# Altium PCB menb_HV_v1.0 - Cu.PcbDoc (part 1 of 3)
Units mil, origin at the board's own origin, x right, y up, seen from the top; angles counter-clockwise.
Board outline 6102.36 x 4921.26 mil, 2 copper layers (Top Layer, Bottom Layer); 139 components, 224 nets, 601 pads, 106 vias.
Unrouted connection lines stored in the file: 1.
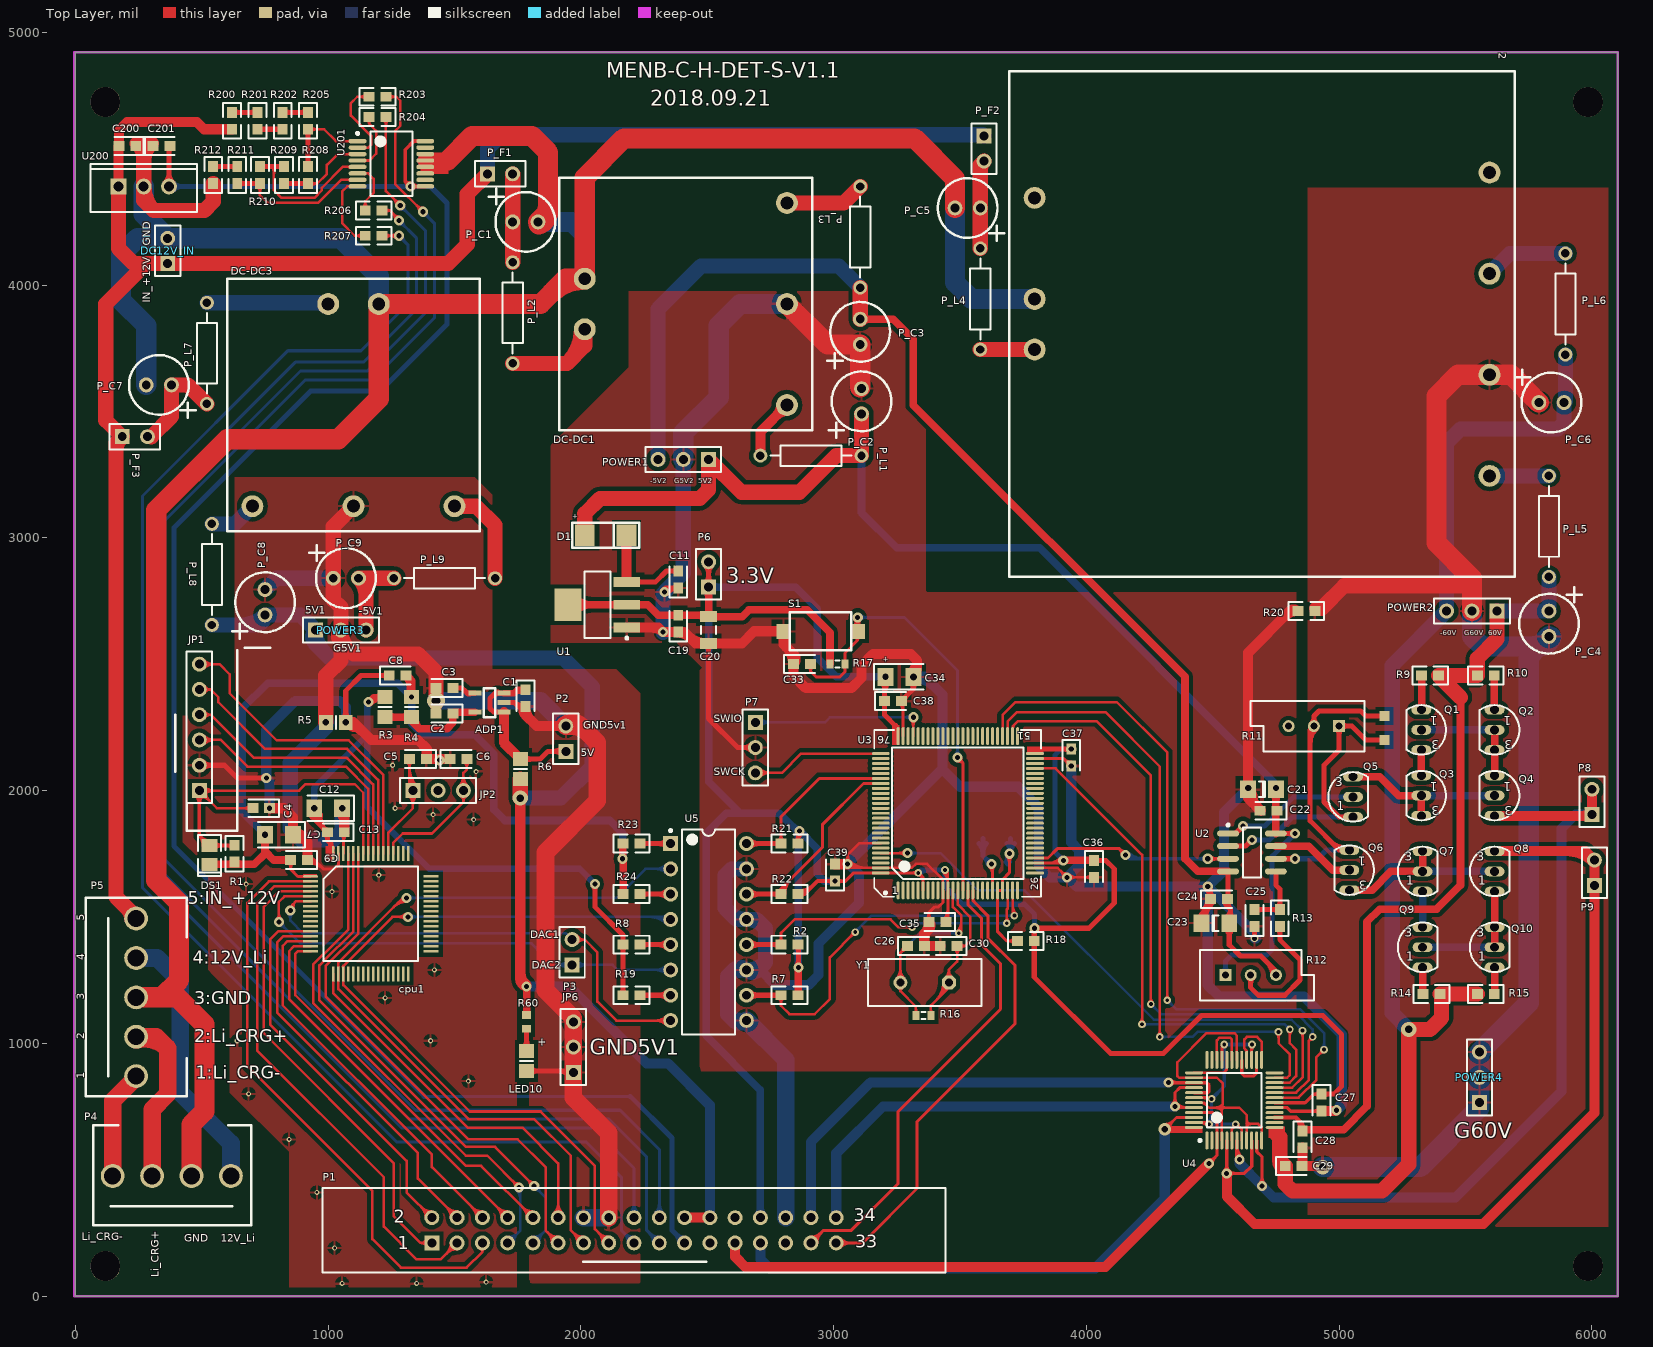
[diagram p0: Top Layer view]
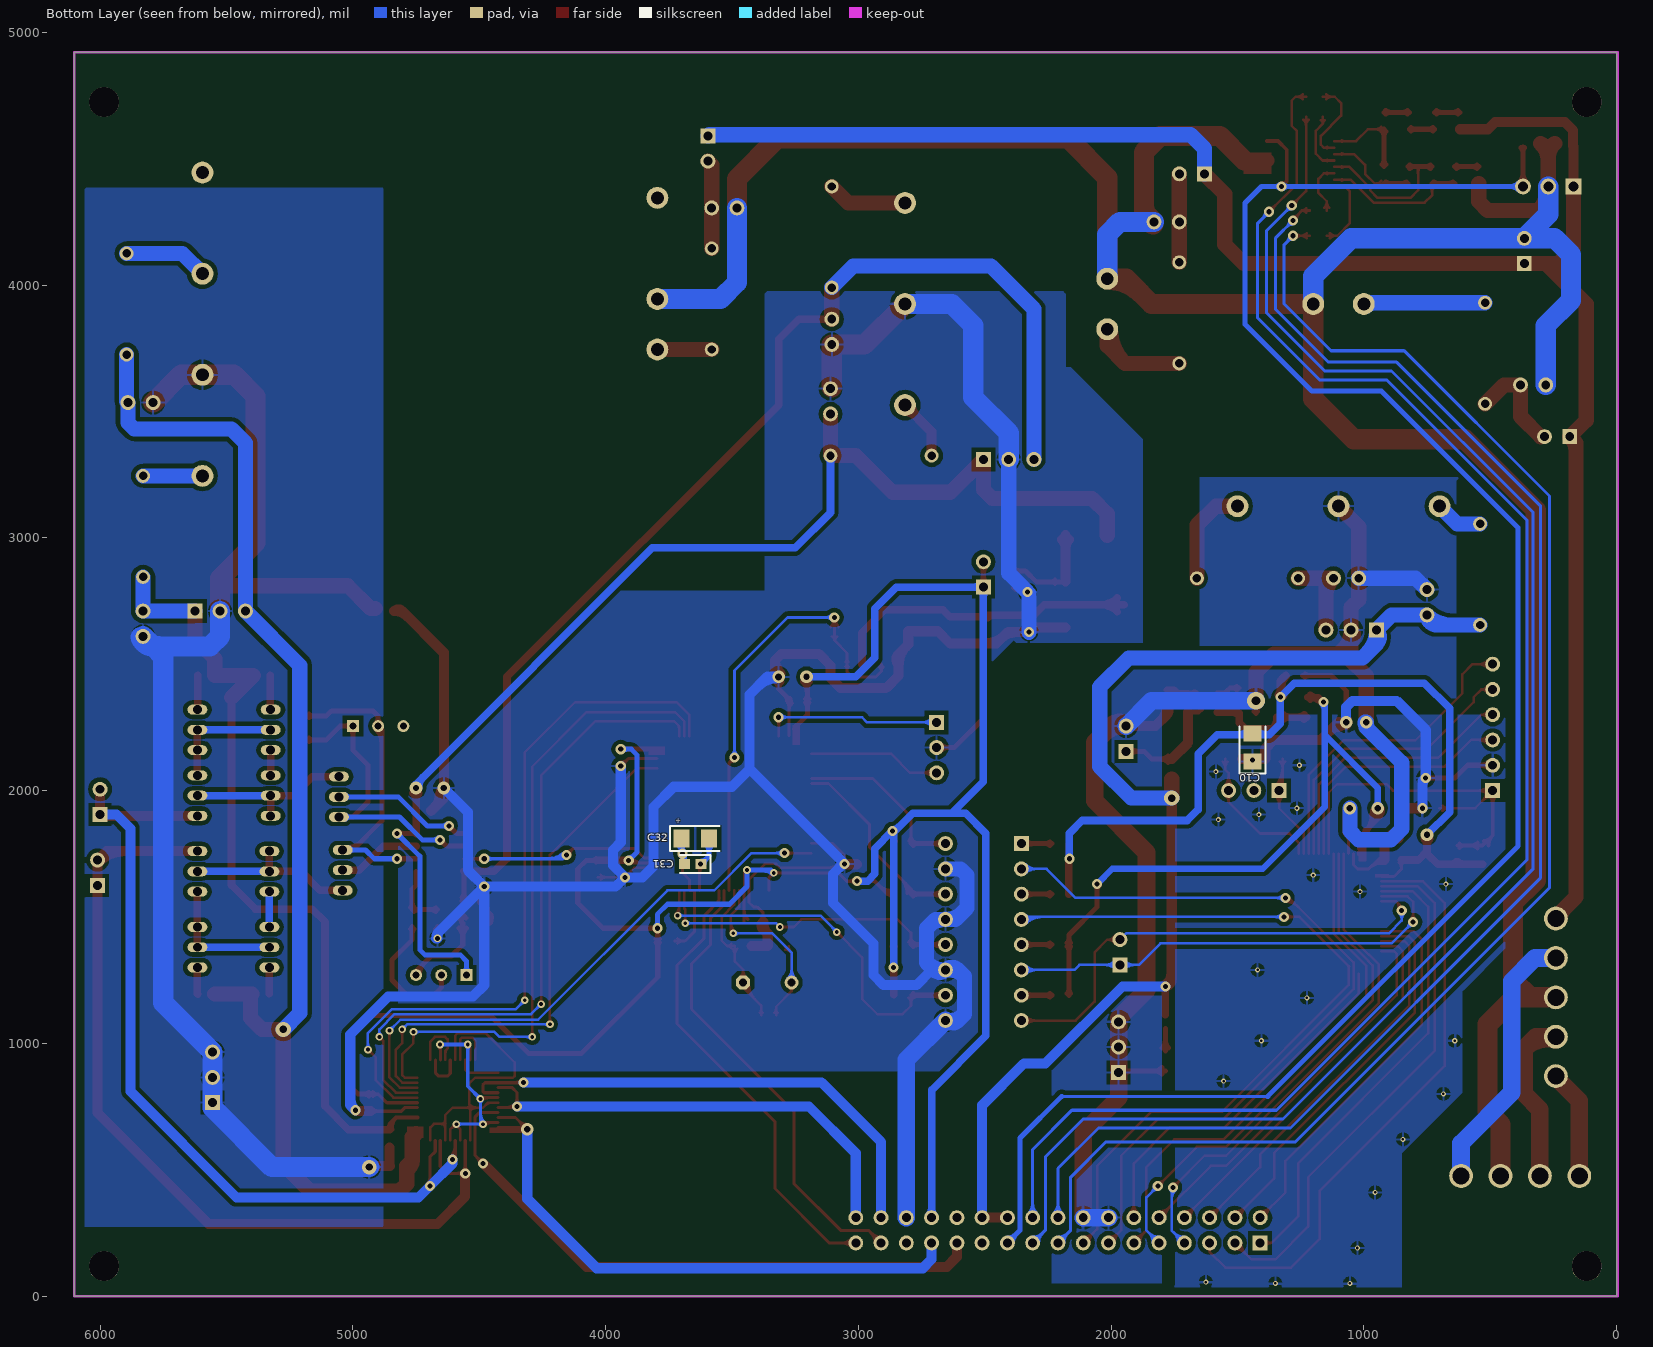
[diagram p1: Bottom Layer view, seen from below]

## Layer stack, top to bottom
Top Layer: signal copper 1.4
Dielectric: dielectric 12.6, FR-4, Dk 4.8
Bottom Layer: signal copper 1.4

## Board outline
0,0 0,4921.26 6102.36,4921.26 6102.36,0

## Design rules (kind name [scope] priority, off if disabled: settings)
Clearance poly [INPolygon] p1: gap=17
Clearance all [All] p2: gap=6
ComponentClearance [All] p1 off: gap=2 collisioncheckmode=3 verticalgap=2 showdistances=FALSE
FabricationTestPointUsage TestPointUsage [All] p1: valid=0 allowmultiple=FALSE
FabricationTestpoint Testpoint [All] p1: side=3 testpointundercomponent=TRUE minsize=40 maxsize=100 preferedsize=60 minholesize=0 maxholesize=40 preferedholesize=32 testpointgrid=1 allowsidetop=TRUE allowsidebottom=TRUE usegrid=TRUE gridtolerance=0.01
HoleSize [All] p1: absolutevalues=TRUE maxlimit=500 minlimit=0 maxpercent=80.000 minpercent=20.000
HoleToHoleClearance [All] p1: gap=1 allowstackedmicrovias=TRUE
MinimumSolderMaskSliver [All] p1: minsoldermaskwidth=0
PolygonConnect [All] p1: connectstyle=Relief reliefconductorwidth=10 reliefentries=4 polygonreliefangle="90 Angle"
RoutingVias [All] p1: holewidth=20 width=30 viastyle="Through Hole" minholewidth=8 minwidth=20 maxholewidth=48 maxwidth=50
SilkToSilkClearance [All] p1: silktosilkclearance=0
SilkscreenOverComponentPads [IsPad] p1: minsilkscreentomaskgap=0
SolderMaskExpansion [All] p1: expansion=4
Width Width_GND [InNetClass('GND')] p1: maxlimit=100 minlimit=10 preferedwidth=80 minimp=50.000000 maximp=50.000000 favimp=50.000000
Width Width_POWER [InNetClass('VCC-VEE')] p2: maxlimit=100 minlimit=10 preferedwidth=40 minimp=50.000000 maximp=50.000000 favimp=50.000000
Width Width_ALL [All] p3: maxlimit=100 minlimit=5 preferedwidth=10 minimp=50.000000 maximp=50.000000 favimp=50.000000
20 further rules are at their usual default settings.

## Classes and differential pairs
component class 输出板: DC12V_IN P4 P5 P11 P12 POWER1 POWER2 POWER3 POWER4 R2 R7 R8 R19 R21 R22 R23 R24 U5
component class U_ADC_USB: ADP1 bead C1 C2 C3 C4 C5 C6 C7 C8 C9 C10 C12 C13 cpu1 DS1 JP1 JP2 JP6 LED10 P1 P2 P3 P10 R1 R3 R4 R5 R6 R60
component class U_电源3: 2 12-34V 33uH DC-DC1 DC-DC3 P_C1 P_C2 P_C3 P_C4 P_C5 P_C6 P_C7 P_C8 P_C9 P_F1 P_F2 P_F3 P_L1 P_L2 P_L3 P_L4 P_L5 P_L6 P_L7 P_L8 P_L9
component class U_Li_Monitor: C200 C201 R200 R201 R202 R203 R204 R205 R206 R207 R208 R209 R210 R211 R212 U200 U201
component class 高压刺激电路: C11 C19 C20 C21 C22 C23 C24 C25 C26 C27 C28 C29 C30 C31 C32 C33 C34 C35 C36 C37 C38 C39 D1 P6 P7 P8 P9 Q1 Q2 Q3 Q4 Q5 Q6 Q7 Q8 Q9 Q10 R9 R10 R11 R12 R13 R14 R15 R16 R17 R18 R20 S1 U1 U2 U3 U4 Y1

## Components (designator, comment, footprint, x,y, rotation, side; value= is the part's Value field where it differs from the comment)
2 "12-60" 12-60 3795,3945 r0 top locked
ADP1 "LDO?" ADP1711_3v3 -28325,32510.2 r90 top
C1 "1u" CC1608-0603 1780,2365.2 r270 top
C2 "1u" CC1608-0603 1460,2305.2 r180 top
C3 "10n" CC1608-0603 1460,2405.2 r180 top
C4 "0.1uF" CC1608-0603 735,1930 r180 top
C5 "15p" CC1608-0603 1355,2125 r180 top
C6 "15p" CC1608-0603 1515,2125 r0 top
C7 "10uF" CC3216-1206 805,1825 r180 top
C8 "Cap Semi" CC1608-0603 1275,2455 r0 top
C9 "0.1uF" CC1608-0603 885,1725 r180 top
C10 "10uF" CC3216-1206 1440,2170 r90 bottom
C11 "104" C0603 2385,2835 r90 top
C12 "10uF" CC3216-1206 1000,1930 r180 top
C13 "0.1uF" CC1608-0603 1030,1835 r180 top
C19 "104" C0603 2385,2660 r90 top
C20 "10uF/16V" C1206 2505,2635 r270 top
C21 "Cap" 1206 4695,2005 r180 top
C22 "0.1uF" CC1608-0603 4720,1920 r180 top
C23 "Cap" 1206 4510,1475 r0 top
C24 "0.1uF" CC1608-0603 4525,1570 r0 top
C25 "0.1uF" CC1608-0603 4665,1495 r90 top
C26 "20pF" C0603 3325,1385 r0 top
C27 "0.1uF" C0603 4930,765 r270 top
C28 "0.1uF" C0603 4855,620 r270 top
C29 "0.1uF" C0603 4820,515 r0 top
C30 "20pF" C0603 3455,1385 r180 top
C31 "104" C0603 3655,1710 r0 bottom
C32 "10uF/50V" C0805 3645.04,1810 r180 bottom
C33 "0.1uF" C0603 2875,2500 r0 top
C34 "10uF/50V" C0805 3260,2450 r0 top
C35 "0.1uF" C0603 3410,1480 r180 top
C36 "0.1uF" C0603 4030,1690 r270 top
C37 "0.1uF" C0603 3940,2130 r270 top
C38 "0.1uF" C0603 3235,2355 r0 top
C39 "0.1uF" C0603 3005,1675 r90 top
C200 "0.33uF" cap0603 205,4550 r180 top
C201 "0.1uF" cap0603 340,4550 r0 top
cpu1 "MSP430F169" msp430f149 930,1660 r0 top locked
D1 "SS14" "DO-214 SMA" 2180,3010 r180 top
DC12V_IN "Header 2" HDR1X2 365,4085 r90 top
DC-DC1 "12-5" 12-5 2015,4025 r0 top
DC-DC3 "12-5" 12-5 1200,3925 r270 top
DS1 "IN4148" "SMD _LED" 530,1745 r90 top
JP1 "Header 6" HDR1X6 490,2000 r90 top locked
JP2 "8M" HDR1X3 1335,2000 r0 top
JP6 "Header 3" HDR1X3 1970,885 r90 top
LED10 "LED" 6-0805_M 1785,930 r270 top
P1 "Header 17X2" HDR2X17-NIUJIAO 1410,210 r0 top
P2 "Header 2" HDR1X2 1940,2155 r90 top (schematic designator JP1)
P3 "Header 2" HDR1X2 1965,1310 r90 top
P4 "Header 4" POWER-4P 615,475 r180 top
P5 "Header 5" POWER-5P 240,870 r90 top
P6 "Header 2" HDR1X2 2505,2805 r90 top
P7 "ST-LINK" HDR1X3 2690,2270 r270 top
P8 "Header 2" HDR1X2 6000,1905 r90 top
P9 "Header 2" HDR1X2 6010,1625 r90 top
P_C1 "Cap Pol3" cap_2.54 1780,4250 r0 top
P_C2 "Cap Pol3" cap_2.54 3110,3540 r90 top
P_C3 "Cap Pol3" cap_2.54 3105,3815 r90 top
P_C4 "10uF/100V" cap_2.54 5830,2660 r270 top
P_C5 "Cap Pol3" cap_2.54 3530,4305 r180 top
P_C6 "10uF/100V" cap_2.54 5840,3535 r0 top
P_C7 "Cap Pol3" cap_2.54 330,3605 r180 top
P_C8 "Cap Pol3" cap_2.54 750,2745 r90 top
P_C9 "Cap Pol3" cap_2.54 1070,2840 r0 top
P_F1 "Fuse 1" HDR1X2 1630,4440 r0 top
P_F2 "Fuse 1" HDR1X2 3595,4590 r270 top
P_F3 "Fuse 1" HDR1X2 185,3400 r0 top
P_L1 "Inductor" AXIAL-0.4 2910,3325 r0 top
P_L2 "Inductor" AXIAL-0.4 1730,3890 r270 top
P_L3 "Inductor" AXIAL-0.4 3105,4190 r270 top
P_L4 "Inductor" AXIAL-0.4 3580,3945 r270 top
P_L5 "Inductor" AXIAL-0.4 5830,3045 r270 top
P_L6 "Inductor" AXIAL-0.4 5895,3925 r270 top
P_L7 "Inductor" AXIAL-0.4 520,3730 r90 top
P_L8 "Inductor" AXIAL-0.4 540,2855 r270 top
P_L9 "Inductor" AXIAL-0.4 1460,2840 r180 top
POWER1 "Header 3" HDR1X3 2505,3310 r180 top
POWER2 "Header 3" HDR1X3 5625,2710 r180 top
POWER3 "Header 3" HDR1X3 950,2635 r0 top
POWER4 "Header 3" HDR1X3 5555,765 r90 top
Q1 "2N6520" TO-92A 5325,2240 r180 top
Q2 "2N6520" TO-92A 5615,2240 r180 top
Q3 "2N6520" TO-92A 5325,1980 r180 top
Q4 "2N6520" TO-92A 5615,1980 r180 top
Q5 "2N6517" TO-92A 5055,1975 r0 top
Q6 "2N6520" TO-92A 5040,1685 r180 top
Q7 "2N6517" TO-92A 5330,1680 r0 top
Q8 "2N6517" TO-92A 5615,1680 r0 top
Q9 "2N6517" TO-92A 5330,1380 r0 top
Q10 "2N6517" TO-92A 5615,1380 r0 top
R1 "100K" C1608-0603 630,1750 r270 top
R2 "10k" R0603 2825,1390 r180 top
R3 "1" 6-0805_M 1225,2330 r270 top
R4 "1" 6-0805_M 1330,2330 r270 top
R5 "Bead" 6-0805_M 1030,2270 r180 top
R6 "Bead" 6-0805_M 1760,2085 r270 top
R7 "10k" R0603 2825,1190 r0 top
R8 "1k" R0603 2200,1390 r0 top
R9 "Res3" C1608-0603 5360,2455 r0 top
R10 "Res3" C1608-0603 5580,2455 r180 top
R11 "100" VR5 4900,2255 r180 top
R12 "20k" VR5 4650,1270 r0 top
R13 "Res3" C1608-0603 4765,1495 r270 top
R14 "Res3" C1608-0603 5365,1195 r180 top
R15 "Res3" C1608-0603 5580,1195 r0 top
R16 "1M" J1-0603 3355,1110 r180 top
R17 "10K" J1-0603 3015,2500 r180 top
R18 "10R" R0603 3760,1405 r180 top
R19 "1k" R0603 2200,1190 r0 top
R20 "0R" R0603 4870,2710 r0 top
R21 "10k" R0603 2825,1790 r180 top
R22 "10k" R0603 2825,1590 r0 top
R23 "1k" R0603 2200,1790 r0 top
R24 "1k" R0603 2200,1590 r0 top
R60 "2K" 1608[0603] 1785,1085 r90 top
R200 "36k" RES0603 620,4650 r270 top
R201 "10k" RES0603 720,4650 r90 top
R202 "10k" RES0603 820,4650 r270 top
R203 "2k" RES0603 1195,4745 r0 top
R204 "2k" RES0603 1195,4665 r0 top
R205 "36k" RES0603 920,4650 r90 top
R206 "2k" RES0603 1180,4295 r0 top
R207 "2k" RES0603 1180,4195 r0 top
R208 "1.8k" RES0603 920,4435 r90 top
R209 "1.5k" RES0603 825,4435 r270 top
R210 "750R" RES0603 730,4435 r90 top
R211 "10k" RES0603 640,4435 r270 top
R212 "750R" RES0603 545,4435 r90 top
S1 "RESET" SWITCH 3070,2630 r180 top
U1 "AMS1117-3.3" SOT223-4M 2065,2735 r180 top
U2 "TLC2252" INA128_SO8 4655,1755 r0 top
U3 "STM32F103VET6" LQFP100 3255,1605 r90 top
U4 "MAX14803" TQFP48_N 4585,775 r90 top
U5 "TLP521-4" DIP-16 2505,1440 r0 top
U200 "L7805" TO-220-AB 270,4390 r0 top
U201 "CN1185" SSOP16_L 1250,4480 r0 top
Y1 "8M" BCY-W2/E4.7 3360,1240 r180 top

## Footprints (in the part's own frame and the unit in brackets; to place one, negate y for a bottom-side part, rotate by r counter-clockwise, add the part's x,y. Pads: shape width x height; smd on the part's side, far side on the other; paste and mask are expansions set on the pad)
6-0805_M [mm] "Chip Resis"
  rect 1.4x1.5 smd: 1(-1,0) 2(1,0)
  silkscreen extent 0,-0.65 0,0.65, body extent -1.07,-0.7 1.07,0.7, height 0.7
12-5 [mm]
  round 2.2 hole 1.3: 1(0,-5.08) 2(0,0) 3(20.32,7.62) 4(20.32,-2.54) 5(20.32,-12.7)
  silkscreen extent -2.54,-15.24 22.86,10.16
12-60 [mm]
  round 2.2 hole 1.3: 1(0,0) 2(0,-5.08) 3(45.72,2.54) 4(45.72,-7.62) 5(45.72,-17.78) 6(0,10.16) 7(45.72,12.7)
  silkscreen extent -2.54,-27.94 48.26,22.86
1206 [mm]
  rect 1.6x1.8 smd: 1(-1.4,0) 2(1.4,0)
  silkscreen extent -0.3,-0.8 0.3,0.8
1608[0603] [mm] "Chip Capacitor, Body 1.6x0.8mm, IPC High Density"
  rect 0.8x0.9 smd: 1(-0.7,0) 2(0.7,0)
  body extent -0.87,-0.48 0.87,0.48, height 1.3
ADP1711_3v3 [mm]
  rect 0.5x1.3 smd: 1(-767.08,-762.508) 2(-766.13,-762.508) 3(-765.18,-762.508) 4(-765.18,-759.587) 5(-767.08,-759.587)
  silkscreen extent -767.59,-761.62 -764.67,-760.48
AXIAL-0.4 [mm]
  round 1.4 hole 0.85: 1(-5.08,0) 2(5.08,0)
  silkscreen extent -4.06,-1.02 4.06,1.02
BCY-W2/E4.7 [mm]
  oct 1.4x1.4 hole 0.8: 1(-2.44,0)
  round 1.4 hole 0.8: 2(2.44,0)
  silkscreen extent -5.7,-2.35 5.7,2.35
C0603 [mm]
  rect 1.1x1 smd: 1(-0.85,0) 2(0.85,0)
  silkscreen extent -1.8,-0.9 1.3,0.9
C0805 [mm]
  rect 1.6x1.8 smd: 1(-1.4,0) 2(1.4,0)
  silkscreen extent -2.54,-1.27 2.41,1.27
C1206 [mm]
  rect 1.1x1.7 smd: 1(-1.35,0) 2(1.35,0)
  silkscreen extent -0.4,-0.75 0.4,0.75, body extent -1.7,-0.9 1.7,0.9, height 1.3
C1608-0603 [mm]
  rect 1.1x1 smd: 1(-0.85,0) 2(0.85,0)
  silkscreen extent -1.8,-0.9 1.8,0.9
cap0603 [mm]
  rect 1.1x1 smd: 1(-0.85,0) 2(0.85,0)
  silkscreen extent -1.8,-0.9 1.3,0.9
cap_2.54 [mm]
  round 1.5 hole 0.9: 1(-1.27,0) 2(1.27,0)
  silkscreen extent -3.68,-3 3,3.3
CC1608-0603 [mm]
  rect 1.1x1 smd: 1(-0.85,0) 2(0.85,0)
  silkscreen extent -1.8,-0.9 1.3,0.9
CC3216-1206 [mm]
  rect 1.6x1.8 smd: 1(-1.4,0) 2(1.4,0)
  silkscreen extent -2.6,-1.3 2.1,1.3
DIP-16 [mm]
  rect 1.5x1.5 hole 0.9: 1(-3.81,8.89)
  round 1.5 hole 0.9: 2(-3.81,6.35) 3(-3.81,3.81) 4(-3.81,1.27) 5(-3.81,-1.27) 6(-3.81,-3.81) 7(-3.81,-6.35) 8(-3.81,-8.89) 9(3.81,-8.89) 10(3.81,-6.35) 11(3.81,-3.81) 12(3.81,-1.27) 13(3.81,1.27) 14(3.81,3.81) 15(3.81,6.35) 16(3.81,8.89)
  silkscreen extent -3.93,-10.3 2.65,10.31, body extent -3.6,-10.28 3.6,10.28, height 5.08
"DO-214 SMA" [mil]
  rect 79x85 smd: A(165,0) K(0,0)
  silkscreen extent -50,-50 215,50
HDR1X2 [mm] "Connector; Header; 2 Position"
  rect 1.5x1.5 hole 0.9: 1(0,0)
  round 1.5 hole 0.9: 2(2.54,0)
  silkscreen extent -1.27,-1.27 3.81,1.27
HDR1X3 [mm] "Connector; Header; 3 Position"
  rect 1.5x1.5 hole 0.9: 1(0,0)
  round 1.5 hole 0.9: 2(2.54,0) 3(5.08,0)
  silkscreen extent -1.27,-1.27 6.35,1.27
HDR1X6 [mm]
  rect 1.5x1.5 hole 0.9: 1(0,0)
  round 1.5 hole 0.9: 2(2.54,0) 3(5.08,0) 4(7.62,0) 5(10.16,0) 6(12.7,0)
  silkscreen extent -1.27,-1.27 13.97,1.27
HDR2X17-NIUJIAO [mm]
  rect 1.5x1.5 hole 0.9: 1(0,0)
  round 1.5 hole 0.9: 2(0,2.54) 3(2.54,0) 4(2.54,2.54) 5(5.08,0) 6(5.08,2.54) 7(7.62,0) 8(7.62,2.54) 9(10.16,0) 10(10.16,2.54) 11(12.7,0) 12(12.7,2.54) 13(15.24,0) 14(15.24,2.54) 15(17.78,0) 16(17.78,2.54) 17(20.32,0) 18(20.32,2.54) 19(22.86,0) 20(22.86,2.54) 21(25.4,0) 22(25.4,2.54) 23(27.94,0) 24(27.94,2.54) 25(30.48,0) 26(30.48,2.54) 27(33.02,0) 28(33.02,2.54) 29(35.56,0) 30(35.56,2.54) 31(38.1,0) 32(38.1,2.54) 33(40.64,0) 34(40.64,2.54)
  silkscreen extent -11,-2.98 51.6,5.52
INA128_SO8 [mm]
  oval 2.2x0.6 smd: 1(-2.4,1.905) 2(-2.4,0.635) 3(-2.4,-0.635) 4(-2.4,-1.905) 5(2.4,-1.905) 6(2.4,-0.635) 7(2.4,0.635) 8(2.4,1.905)
  silkscreen extent -2.52,-2.5 0.9,2.88, body extent -1.95,-2.45 1.95,2.45, height 1.75
J1-0603 [mm]
  rect 0.7x0.9 smd: 1(-0.75,0) 2(0.75,0)
  silkscreen extent -0.2,-0.35 0.2,0.35, body extent -0.85,-0.48 0.85,0.48, height 0.9
LQFP100 [mm]
  oval 1.8x0.3 smd: 1(0,0) 2(0,-0.5) 3(0,-1) 4(0,-1.5) 5(0,-2) 6(0,-2.5) 7(0,-3) 8(0,-3.5) 9(0,-4) 10(0,-4.5) 11(0,-5) 12(0,-5.5) 13(0,-6) 14(0,-6.5) 15(0,-7) 16(0,-7.5) 17(0,-8) 18(0,-8.5) 19(0,-9) 20(0,-9.5) 21(0,-10) 22(0,-10.5) 23(0,-11) 24(0,-11.5) 25(0,-12) 51(15.5,-12) 52(15.5,-11.5) 53(15.5,-11) 54(15.5,-10.5) 55(15.5,-10) 56(15.5,-9.5) 57(15.5,-9) 58(15.5,-8.5) 59(15.5,-8) 60(15.5,-7.5) 61(15.5,-7) 62(15.5,-6.5) 63(15.5,-6) 64(15.5,-5.5) 65(15.5,-5) 66(15.5,-4.5) 67(15.5,-4) 68(15.5,-3.5) 69(15.5,-3) 70(15.5,-2.5) 71(15.5,-2) 72(15.5,-1.5) 73(15.5,-1) 74(15.5,-0.5) 75(15.5,0)
  oval 0.3x1.8 smd: 26(1.75,-13.75) 27(2.25,-13.75) 28(2.75,-13.75) 29(3.25,-13.75) 30(3.75,-13.75) 31(4.25,-13.75) 32(4.75,-13.75) 33(5.25,-13.75) 34(5.75,-13.75) 35(6.25,-13.75) 36(6.75,-13.75) 37(7.25,-13.75) 38(7.75,-13.75) 39(8.25,-13.75) 40(8.75,-13.75) 41(9.25,-13.75) 42(9.75,-13.75) 43(10.25,-13.75) 44(10.75,-13.75) 45(11.25,-13.75) 46(11.75,-13.75) 47(12.25,-13.75) 48(12.75,-13.75) 49(13.25,-13.75) 50(13.75,-13.75) 76(13.75,1.75) 77(13.25,1.75) 78(12.75,1.75) 79(12.25,1.75) 80(11.75,1.75) 81(11.25,1.75) 82(10.75,1.75) 83(10.25,1.75) 84(9.75,1.75) 85(9.25,1.75) 86(8.75,1.75) 87(8.25,1.75) 88(7.75,1.75) 89(7.25,1.75) 90(6.75,1.75) 91(6.25,1.75) 92(5.75,1.75) 93(5.25,1.75) 94(4.75,1.75) 95(4.25,1.75) 96(3.75,1.75) 97(3.25,1.75) 98(2.75,1.75) 99(2.25,1.75) 100(1.75,1.75)
  silkscreen extent -0.64,-14.35 16.13,2.41
msp430f149 [mm]
  oval 1.5x0.25 smd: 1(0,0)
  rect 1.5x0.25 smd: 2(0,-0.5) 3(0,-1) 4(0,-1.5) 5(0,-2) 6(0,-2.5) 7(0,-3) 8(0,-3.5) 9(0,-4) 10(0,-4.5) 11(0,-5) 12(0,-5.5) 13(0,-6) 14(0,-6.5) 15(0,-7) 16(0,-7.5) 33(12.1,-7.5) 34(12.1,-7) 35(12.1,-6.5) 36(12.1,-6) 37(12.1,-5.5) 38(12.1,-5) 39(12.1,-4.5) 40(12.1,-4) 41(12.1,-3.5) 42(12.1,-3) 43(12.1,-2.5) 44(12.1,-2) 45(12.1,-1.5) 46(12.1,-1) 47(12.1,-0.5) 48(12.1,0)
  rect 0.25x1.5 smd: 17(2.3,-9.8) 18(2.8,-9.8) 19(3.3,-9.8) 20(3.8,-9.8) 21(4.3,-9.8) 22(4.8,-9.8) 23(5.3,-9.8) 24(5.8,-9.8) 25(6.3,-9.8) 26(6.8,-9.8) 27(7.3,-9.8) 28(7.8,-9.8) 29(8.3,-9.8) 30(8.8,-9.8) 31(9.3,-9.8) 32(9.8,-9.8) 49(9.8,2.3) 50(9.3,2.3) 51(8.8,2.3) 52(8.3,2.3) 53(7.8,2.3) 54(7.3,2.3) 55(6.8,2.3) 56(6.3,2.3) 57(5.8,2.3) 58(5.3,2.3) 59(4.8,2.3) 60(4.3,2.3) 61(3.8,2.3) 62(3.3,2.3) 63(2.8,2.3) 64(2.3,2.3)
  silkscreen extent 1.28,-8.51 10.81,1.02
POWER-4P [mm]
  round 2.4 hole 1.7: 1(0,0) 2(3.96,0) 3(7.92,0) 4(11.88,0)
  silkscreen extent -2.03,-5.08 13.84,4.95
POWER-5P [mm]
  round 2.4 hole 1.7: 1(0,0) 2(3.96,0) 3(7.92,0) 4(11.88,0) 5(15.84,0)
  silkscreen extent -2.03,-5.08 17.91,5.08
R0603 [mm]
  rect 1.1x1 smd: 1(-0.85,0) 2(0.85,0)
  silkscreen extent -1.8,-0.9 1.8,0.9
RES0603 [mm]
  rect 1.1x1 smd: 1(-0.85,0) 2(0.85,0)
  silkscreen extent -1.8,-0.9 1.8,0.9
"SMD _LED" [mm]
  rect 1.3x1.6 smd: 1(0.95,0) 2(-0.95,0)
  silkscreen extent -2.13,-1.15 2,1.15
SOT223-4M [mm]
  rect 2.7x1 smd: 1(-2.95,2.3) 2(-2.95,0) 3(-2.95,-2.3)
  rect 2.7x3.3 smd: 4(2.95,0)
  silkscreen extent -3.08,-3.35 1.3,3.47, body extent -1.85,-3.35 1.85,3.35, height 1.8
SSOP16_L [mm]
  oval 1.8x0.45 smd: 1(-3.4,2.275) 2(-3.4,1.625) 3(-3.4,0.975) 4(-3.4,0.325) 5(-3.4,-0.325) 6(-3.4,-0.975) 7(-3.4,-1.625) 8(-3.4,-2.275) 9(3.4,-2.275) 10(3.4,-1.625) 11(3.4,-0.975) 12(3.4,-0.325) 13(3.4,0.325) 14(3.4,0.975) 15(3.4,1.625) 16(3.4,2.275)
  silkscreen extent -3.52,-3.25 2.1,3.25, body extent -2.7,-3.25 2.7,3.25, height 2
SWITCH [mm]
  rect 1.5x1.5 smd: 1(-0.6,0) 4(6.8,0)
  silkscreen extent 0,-1.9 6.2,1.9
TO-92A [mm]
  oval 2x1 hole 0.9: 1(0,-2.032) 2(0,0) 3(0,2.032)
  silkscreen extent -2.48,-2.48 1.5,2.48
TO-220-AB [mm]
  rect 1.6x1.6 hole 1: 1(-2.54,0)
  round 1.6 hole 1: 2(0,0) 3(2.54,0)
  silkscreen extent -5.35,-2.55 5.35,2.25
TQFP48_N [mm]
  oval 1.8x0.3 smd: 1(-4.05,2.75) 2(-4.05,2.25) 3(-4.05,1.75) 4(-4.05,1.25) 5(-4.05,0.75) 6(-4.05,0.25) 7(-4.05,-0.25) 8(-4.05,-0.75) 9(-4.05,-1.25) 10(-4.05,-1.75) 11(-4.05,-2.25) 12(-4.05,-2.75) 25(4.05,-2.75) 26(4.05,-2.25) 27(4.05,-1.75) 28(4.05,-1.25) 29(4.05,-0.75) 30(4.05,-0.25) 31(4.05,0.25) 32(4.05,0.75) 33(4.05,1.25) 34(4.05,1.75) 35(4.05,2.25) 36(4.05,2.75)
  oval 0.3x1.8 smd: 13(-2.75,-4.05) 14(-2.25,-4.05) 15(-1.75,-4.05) 16(-1.25,-4.05) 17(-0.75,-4.05) 18(-0.25,-4.05) 19(0.25,-4.05) 20(0.75,-4.05) 21(1.25,-4.05) 22(1.75,-4.05) 23(2.25,-4.05) 24(2.75,-4.05) 37(2.75,4.05) 38(2.25,4.05) 39(1.75,4.05) 40(1.25,4.05) 41(0.75,4.05) 42(0.25,4.05) 43(-0.25,4.05) 44(-0.75,4.05) 45(-1.25,4.05) 46(-1.75,4.05) 47(-2.25,4.05) 48(-2.75,4.05)
  silkscreen extent -4.17,-2.75 2.75,3.57, body extent -3.5,-3.5 3.5,3.5, height 1.6
VR5 [mm]
  rect 1.2x1.2 hole 0.7: 1(-2.54,0)
  round 1.2 hole 0.7: 2(0,0) 3(2.54,0)
  silkscreen extent -5.08,-2.54 6.35,2.54

## Part data
ADP1: library part ADP1711_3v3
C1 C2 C3 C4 C5 C6 C7 C9 C10 C12 C13: library part "Cap Semi", "Capacitor (Semiconductor SIM Model)"
C8: "Capacitor (Semiconductor SIM Model)"
C11 C19 C22 C24 C25 C26 C27 C28 C29 C30 C31 C33 C35 C36 C37 C38 C39: library part "Cap Semi", "Capacitor (Semicond"
C20 C21 C23: library part "Cap Pol1", "Polarized C"
C32 C34: library part "Cap Pol3", "Polarized Capacitor (Surface Moun"
C200 C201: library part Cap, "Capacitor"
cpu1: library part MSP430F149
D1: library part Diode, "1.0 Ampere Schottky Ba"
DC12V_IN P2: "Header, 2-Pin"
DS1 LED10: library part LED3, "Typical BLUE SiC LED"
JP1: "Header, 6"
JP2: library part "Header 3", "Header, 3-Pin"
JP6 POWER1 POWER2 POWER3 POWER4: "Header, 3"
P1: "Header, 17"
P3: "Header, 2"
P4: "Header, 4"
P5: "Header, 5"
P_C1 P_C2 P_C3 P_C5 P_C8 P_C9: "Polarized Capacitor (Surfac"
P_C4 P_C6: library part "Cap Pol3", "Polarized Capacitor (Surfac"
P_C7: "Polarized Capacitor (Surface Mount)"
P_F1 P_F2: library part Fu
Q1 Q2 Q3 Q4 Q6: library part 2N3906, "PNP General P"
Q5 Q7 Q8 Q9 Q10: library part 2N3904, "NPN General P"
R1 R60: library part Res3, "Resistor"
R2 R7 R8 R19 R21 R22 R23 R24: library part Res1, "Resist"
R3 R4: library part "Res Semi", "Semiconductor Resistor"
R5 R6 R18 R20: library part Res2, "Resistor"
R9 R10 R13 R14 R15: "Resi"
R11 R12: library part ResVa
R200 R201 R202 R203 R204 R205 R206 R207 R208 R209 R210 R211 R212: library part Res1, "Resistor"
S1: library part SW-PB
U2: library part TLC22
Y1: library part XTAL, "Crystal Os"

## Free pads (board coordinates)
  rect 39.37x39.37 smd: 0(5180,2200) 0(5180,2295)
  round 118.11 hole 118.11: 0(5984.25,118.11) 1(118.11,118.11) 2(5984.25,4724.41) 3(118.11,4724.41)

## Via types
v1: diameter 40, hole 20, Top Layer to Bottom Layer, tented both sides, 48 vias
v2: diameter 20, hole 10, Top Layer to Bottom Layer, tented both sides, 20 vias
v3: diameter 30, hole 15, Top Layer to Bottom Layer, tented both sides, 20 vias
v4: diameter 50, hole 25, Top Layer to Bottom Layer, 5 vias
v5: diameter 50, hole 25, Top Layer to Bottom Layer, tented both sides, 4 vias
v6: diameter 40, hole 20, Top Layer to Bottom Layer, 2 vias
v7: diameter 50, hole 28, Top Layer to Bottom Layer, 1 vias
v8: diameter 30, hole 20, Top Layer to Bottom Layer, tented both sides, 1 vias
v9: diameter 31, hole 15, Top Layer to Bottom Layer, tented both sides, 1 vias
v10: diameter 70, hole 35, Top Layer to Bottom Layer, tented both sides, 1 vias
v11: diameter 60, hole 30, Top Layer to Bottom Layer, tented both sides, 1 vias
v12: diameter 58, hole 28, Top Layer to Bottom Layer, 1 vias
v13: diameter 60, hole 30, Top Layer to Bottom Layer, 1 vias

## Nets (pads, with @x,y where several pads share a name; then routed paths per layer and width w, separated by ;. In a path a pad name is that pad's centre, name@x,y a point inside that pad or via, vN(x,y) a via of type N, cw(c..) or ccw(c..) an arc to the next point about the centre after c; other vN are vias at no path point)
3.3V: C19.2 C20.1 C27.1 C34.1 C35.1 C36.1 C37.1 C38.1 C39.1 P1.28 P6.1 P6.2 R2.1 R7.2 R17.2 R18.1 R21.1 R22.2 U1.2 U1.4 U3.6 U3.11 U3.28 U3.50 U3.75 U3.100 U4.18 | length 13882.6
  Top Layer w10: 3247.62,2222.62 U3.75@3255,2215.24 ; v9@3432.58,1677.58 cw(c3386.04,1631.04) U3.11@3451.85,1631.04 ; v9@3439.65,1684.65 cw(c3410.18,1655.18) 3451.85,1655.18 ; v9(3440,1685) 3451.85,1673.15 ; v9@3443.44,1675.08 cw(c3446.11,1667.41) 3451.85,1673.15 ; v9@3449.92,1681.56 ccw(c3457.59,1678.89) 3451.85,1673.15 ; U3.11@3451.85,1605 3451.85,1673.15
  Top Layer w12: U3.28@3796.34,1713.27 3898.27,1713.27 v1(3908.46,1723.46) ; 3850.05,1713.27 ccw(c3850.05,1781.88) v1@3898.57,1733.36 ; 3879.02,1713.27 ccw(c3879.02,1752.91) v1@3907.05,1724.88
  Top Layer w13: v1(3005,1641.54) 3046.54,1641.54 3078.9,1673.9 U3.100@3186.1,1673.9 v3(3334.53,1673.9) 3353.43,1655 U3.6@3353.43,1605 ; C39.1@3014.32,1632.21 cw(c3036.83,1609.7) 3036.83,1641.54 cw(c3036.83,1673.37) C39.1@3014.32,1650.86 ; C39.1@3014.55,1631.99 cw(c3037.59,1608.94) 3037.59,1641.54 cw(c3037.59,1674.13) C39.1@3014.55,1651.08 ; v3@3328.52,1667.89 ccw(c3314.01,1653.38) 3314.01,1673.9 ccw(c3314.01,1694.42) v3@3328.52,1679.91 ; v3@3334.53,1665.4 cw(c3334.53,1644.88) 3349.04,1659.39 cw(c3363.55,1673.9) v3@3343.03,1673.9 ; C35.1@3436.11,1489.32 ccw(c3398.11,1527.32) 3451.85,1527.32 ; C35.1@3451.85,1478.15 U3.11@3451.85,1605 ; U4.18@4744.45,765.16 4865.16,765.16 4898.46,798.46 ; C27.1@4920.61,789.2 ccw(c4898.47,767.35) 4898.47,798.46 ; C27.1@4920.61,807.73 cw(c4898.47,829.58) 4898.47,798.46 ; C27.1@4930,798.46 4898.46,798.46
  Top Layer w15: R21.1@2849.85,1798.62 ccw(c2829.05,1819.42) 2858.46,1819.42 ccw(c2887.88,1819.42) R21.1@2867.08,1798.62 ; R22.2@2858.46,1590 2885,1590 ; R21.1@2858.46,1790 2858.46,1833.46 v1(2865,1840) ; R21.1@2858.46,1794.04 cw(c2910.96,1794.04) v1@2873.84,1831.16 ; R22.2@2860.43,1587.18 ccw(c2860.43,1639.7) 2897.57,1602.57 ; R22.2@2860.43,1602.18 ccw(c2860.43,1690.91) 2923.17,1628.17 ; R22.2@2870.13,1582.63 cw(c2885,1571.33) 2885,1590 ; R22.2@2870.13,1597.37 ccw(c2885,1608.67) 2885,1590 ; C39.1@2996.16,1632.7 ccw(c2974.82,1611.36) 2974.82,1641.54 ccw(c2974.82,1671.71) C39.1@2996.16,1650.37 ; C39.1@2996.38,1632.92 ccw(c2975.58,1612.12) 2975.58,1641.54 ccw(c2975.58,1670.95) C39.1@2996.38,1650.15 ; v1(3005,1641.54) 2936.54,1641.54 2885,1590 ; C34.1@3201.54,2446.65 C34.1@3204.88,2450 ; 3247.62,2222.62 3247.62,2252.38 ccw(c3257.12,2252.38) U3.75@3254.57,2243.23 ; 3247.62,2232.64 ccw(c3251.62,2232.64) U3.75@3250.55,2228.78 ; 3247.62,2258.74 ccw(c3268.97,2258.74) U3.75@3253.87,2243.64
  Top Layer w20: P6.1@2491.19,2818.81 ccw(c2457.86,2852.14) 2505,2852.14 ccw(c2552.14,2852.14) P6.1@2518.81,2818.81 ; P6.2@2491.19,2891.19 cw(c2457.86,2857.86) 2505,2857.86 cw(c2552.14,2857.86) P6.2@2518.81,2891.19 ; P6.1@2505,2805 P6.2@2505,2905 ; v1@2852.93,1307.07 ccw(c2835.86,1324.14) 2860,1324.14 ccw(c2884.14,1324.14) v1@2867.07,1307.07 ; R2.1@2853.58,1383.15 cw(c2838.1,1367.66) 2860,1367.66 ; R2.1@2858.46,1390 2860,1388.46 v1(2860,1300) ; 2860,1365.57 cw(c2884.86,1365.57) R2.1@2867.28,1383.15 ; C34.1@3189.68,2430.86 cw(c3161.07,2402.25) 3201.54,2402.25 ; C34.1@3194.39,2439.39 cw(c3177.15,2422.15) C34.1@3201.54,2422.15 ; C38.1@3194.69,2348.15 cw(c3178.15,2331.62) 3201.54,2331.62 cw(c3224.92,2331.62) C38.1@3208.38,2348.15 ; C38.1@3194.69,2361.85 ccw(c3178.15,2378.38) 3201.54,2378.38 ccw(c3224.92,2378.38) C38.1@3208.38,2361.85 ; 3201.54,2386.09 cw(c3264.86,2386.09) C34.1@3220.08,2430.86 ; 3201.54,2405.42 cw(c3249.58,2405.42) C34.1@3215.61,2439.39 ; C34.1@3201.54,2446.65 C38.1@3201.54,2355 3201.54,2298.46 3247.62,2252.38 ; R18.1@3786.62,1398.15 cw(c3770.08,1381.62) 3793.46,1381.62 cw(c3816.85,1381.62) R18.1@3800.31,1398.15 ; R18.1@3786.62,1411.85 ccw(c3770.08,1428.38) 3793.46,1428.38 ccw(c3816.85,1428.38) R18.1@3800.31,1411.85 ; v1@3787.93,1447.93 cw(c3774.56,1434.56) 3793.46,1434.56 ; 3793.46,1427.15 cw(c3822.85,1427.15) 3802.07,1447.93 cw(c3819.14,1430.86) 3819.14,1455 cw(c3819.14,1479.14) v1@3802.07,1462.07 ; U3.50@3805,2150 3805,2155 3813.46,2163.46 v1(3940,2163.46) ; C37.1@3932.93,2156.39 ccw(c3915.86,2139.32) 3915.86,2163.46 ccw(c3915.86,2187.61) C37.1@3932.93,2170.54 ; C37.1@3933.15,2156.62 ccw(c3916.62,2140.08) 3916.62,2163.46 ccw(c3916.62,2186.85) C37.1@3933.15,2170.31 ; C36.1@4030,1723.46 4076.54,1723.46 4110,1690 4110,1555 4010,1455 v1(3795,1455) 3793.46,1453.46 R18.1@3793.46,1405 3793.46,1261.54 4095,960 4305,960 4455,1110 4935,1110 5010,1035 5010,830 4978.46,798.46 C27.1@4930,798.46 ; C36.1@4036.85,1716.62 cw(c4053.38,1700.08) 4053.38,1723.46 cw(c4053.38,1746.85) C36.1@4036.85,1730.31 ; C27.1@4936.85,791.62 cw(c4953.38,775.08) 4953.38,798.46 cw(c4953.38,821.85) C27.1@4936.85,805.31
  Top Layer w30: U1.4@1948.86,2735 U1.2@2181.14,2735 2265,2735 2306.54,2693.46 C19.2@2385,2693.46 C20.1@2505,2693.46 ; U1.4@1975.83,2708.02 cw(c2040.96,2642.9) 2040.96,2735 cw(c2040.96,2827.1) U1.4@1975.83,2761.98 ; 2464.29,2693.46 cw(c2464.29,2659.26) C20.1@2488.48,2683.44 ; P6.1@2494.73,2794.73 cw(c2469.93,2769.93) 2505,2769.93 cw(c2540.07,2769.93) P6.1@2515.27,2794.73 ; P6.1@2505,2805 C20.1@2505,2693.46 ; C20.1@2510,2693.46 C20.1@2505,2693.46 ; R7.2@2860,1191.54 v1(2860,1300) ; R17.2@2985.47,2500 2985.47,2624.53 2895,2715 2665,2715 2638.15,2688.15 C20.1@2505,2688.15 C20.1@2505,2693.46 ; v1(3908.46,1723.46) C36.1@4030,1723.46
  Bottom Layer w20: v3(3334.53,1673.9) 3345.63,1685 v9(3440,1685) 3440,1620 3510,1550 3755,1550 3795,1510 v1(3795,1455) ; v3@3338.06,1670.36 cw(c3373.4,1635.02) 3373.4,1685 ; v1@3787.93,1462.07 ccw(c3770.86,1479.14) 3795,1479.14 ccw(c3819.14,1479.14) v1@3802.07,1462.07 ; v1@3898.46,1723.46 ccw(c3874.32,1723.46) 3891.39,1740.54 ccw(c3908.46,1757.61) v1@3908.46,1733.46 ; v1(3908.46,1723.46) 3875,1756.93 3875,2140 3898.46,2163.46 v1(3940,2163.46) ; v1@3932.93,2156.39 ccw(c3915.86,2139.32) 3915.86,2163.46 ccw(c3915.86,2187.61) v1@3932.93,2170.54
  Bottom Layer w30: P6.1@2494.73,2794.73 cw(c2469.93,2769.93) 2505,2769.93 cw(c2540.07,2769.93) 2515.27,2794.73 cw(c2540.07,2769.93) 2540.07,2805 cw(c2540.07,2840.07) P6.1@2515.27,2815.27 ; P1.28@2699.73,320.27 ccw(c2674.93,345.07) 2710,345.07 ccw(c2745.07,345.07) P1.28@2720.27,320.27 ; P1.28@2710,310 2710,815 2495,1030 2495,1830 2575,1910 2630,1910 ; 2839.39,1855.61 ccw(c2865,1881.21) v1@2865,1845 ; v1(2860,1300) 2860,1835 2785,1910 2630,1910 ; 2860,1815.86 cw(c2889.14,1815.86) v1@2868.54,1836.46 ; v1(2865,1840) 2935,1770 2935,1670 2963.46,1641.54 v1(3005,1641.54) ; v4(3205,2450) 3010,2450 2935,2525 2935,2720 2850,2805 P6.1@2505,2805 2505,2035 2630,1910
5V: ADP1.1 ADP1.3 C1.1 P2.1 R6.1 | length 903.7
  Top Layer w20: 1646.66,2371.66 cw(c1679.25,2339.06) ADP1.3@1679.25,2385.16 ; ADP1.3@1679.36,2385.11 ccw(c1669.74,2375.26) 1660,2385 ; ADP1.1@1695,2310.2 1654.8,2310.2 1640,2325 1640,2365 1660,2385 ; ADP1.3@1695,2385 1660,2385 ; R6.1@1760,2124.37 1839.37,2124.37 1870,2155 P2.1@1940,2155 ; R6.1@1774.38,2111.95 cw(c1804.36,2081.98) 1804.36,2124.37 cw(c1804.36,2166.76) R6.1@1774.38,2136.79 ; P2.1@1926.19,2141.19 ccw(c1892.86,2107.86) 1892.86,2155 ccw(c1892.86,2202.14) P2.1@1926.19,2168.81
  Top Layer w25: ADP1.3@1695,2385 1735,2385 ; C1.1@1776.41,2390.47 ccw(c1759.27,2360.73) 1735,2385 ; C1.1@1780,2398.66 1748.66,2398.66 1735,2385
  Top Layer w40: ADP1.1@1695,2310.2 1695,2189.37 R6.1@1760,2124.37
5V_7805: C201.2 P1.21 U200.3 U201.9 U201.16 | length 8065.8
  Top Layer w15: v1@1312.51,4390.59 ccw(c1286.79,4391.79) 1305,4410 ; v1@1324.41,4402.49 cw(c1323.21,4428.21) 1305,4410 ; v1(1325,4390) 1305,4410 ; v1@1325.43,4390.43 U201.9@1383.86,4390.43 ; v1@1333.84,4381.16 cw(c1356.22,4358.78) U201.9@1356.22,4390.43 ; v1@1333.84,4398.84 ccw(c1354.13,4419.13) U201.9@1354.13,4390.43 ; U201.16@1383.86,4569.57 1339.57,4569.57 1305,4535 1305,4410
  Top Layer w20: U200.3@354.8,4405.2 ccw(c318.1,4441.9) 370,4441.9 ccw(c421.9,4441.9) U200.3@385.2,4405.2 ; C201.2@364.65,4543.15 cw(c351.73,4530.23) 370,4530.23 ; U200.3@370,4390 C201.2@370,4546.54 ; 370,4523.01 cw(c398.49,4523.01) C201.2@378.34,4543.15
  Bottom Layer w12: 1380,790 2195,790
  Bottom Layer w20: U200.3@370,4390 v1(1325,4390) 1405,4390 1470,4325 1470,3845 1205,3580 930,3580 390,3040 390,1780 1380,790 ; U200.3@385.2,4374.8 cw(c421.9,4338.1) 421.9,4390 cw(c421.9,4441.9) U200.3@385.2,4405.2 ; v1@1317.93,4382.93 ccw(c1300.86,4365.86) 1300.86,4390 ccw(c1300.86,4414.14) v1@1317.93,4397.07 ; v1@1332.07,4382.93 cw(c1349.14,4365.86) 1349.14,4390 cw(c1349.14,4414.14) v1@1332.07,4397.07 ; 2195,790 2360,625 2360,260 P1.21@2410,210 ; P1.21@2390.47,210 ccw(c2343.33,210) 2376.66,243.34 ccw(c2410,276.67) P1.21@2410,229.53
10: cpu1.12 P1.2 | length 1687.1
  Top Layer w10: cpu1.12@930,1443.47 803.47,1443.47 770,1410 770,1075 1310,535 1310,410 P1.2@1410,310 ; P1.2@1385.47,310 ccw(c1326.26,310) 1368.13,351.87 ccw(c1410,393.74) P1.2@1410,334.53 ; P1.2@1395.47,310 ccw(c1360.4,310) 1385.2,334.8 ccw(c1410,359.6) P1.2@1410,324.53
11: cpu1.13 P1.4 | length 1673.7
  Top Layer w10: cpu1.13@930,1423.78 823.78,1423.78 798,1398 798,1122 1355,565 1355,465 P1.4@1510,310 ; P1.4@1485.47,310 ccw(c1426.26,310) 1468.13,351.87 ccw(c1510,393.74) P1.4@1510,334.53 ; P1.4@1495.47,310 ccw(c1460.4,310) 1485.2,334.8 ccw(c1510,359.6) P1.4@1510,324.53
12: cpu1.14 P1.6 | length 1668.2
  Top Layer w10: cpu1.14@930,1404.09 839.09,1404.09 820,1385 820,1150 1410,560 1410,510 P1.6@1610,310 ; P1.6@1585.47,310 ccw(c1526.26,310) 1568.13,351.87 ccw(c1610,393.74) P1.6@1610,334.53 ; P1.6@1595.47,310 ccw(c1560.4,310) 1585.2,334.8 ccw(c1610,359.6) P1.6@1610,324.53
13: cpu1.15 P1.8 | length 1653.9
  Top Layer w10: cpu1.15@930,1384.41 865.41,1384.41 845,1364 845,1175 P1.8@1710,310 ; P1.8@1685.47,310 ccw(c1626.26,310) 1668.13,351.87 ccw(c1710,393.74) P1.8@1710,334.53 ; P1.8@1695.47,310 ccw(c1660.4,310) 1685.2,334.8 ccw(c1710,359.6) P1.8@1710,324.53
14: cpu1.16 P1.10 | length 1681.6
  Top Layer w10: cpu1.16@930,1364.72 879.72,1364.72 870,1355 870,1190 1545,515 1605,515 P1.10@1810,310 ; P1.10@1785.47,310 ccw(c1726.26,310) 1768.13,351.87 ccw(c1810,393.74) P1.10@1810,334.53 ; P1.10@1795.47,310 ccw(c1760.4,310) 1785.2,334.8 ccw(c1810,359.6) P1.10@1810,324.53
15: cpu1.17 P1.12 | length 1607.7
  Top Layer w10: cpu1.17@1020.55,1274.17 1020.55,1197.58 1553.13,665 1770,665 1910,525 P1.12@1910,310 ; P1.12@1892.66,327.34 ccw(c1850.79,369.21) 1910,369.21 ccw(c1969.21,369.21) P1.12@1927.34,327.34 ; P1.12@1899.73,320.27 ccw(c1874.93,345.07) 1910,345.07 ccw(c1945.07,345.07) P1.12@1920.27,320.27
16: cpu1.18 P1.13 U5.2 | length 3580.1
  Top Layer w10: 1258.79,1538.79 cw(c1310,1487.57) v1@1310,1560 ; 1275.86,1555.86 cw(c1310,1521.72) v1@1310,1570 ; v1(1310,1575) 1295,1575 1040.24,1320.24 cpu1.18@1040.24,1274.17 1040.24,1214.76 1555,700 1815,700 1960,555 1960,260 P1.13@2010,210 ; P1.13@1985.47,210 ccw(c1926.26,210) 1968.13,251.87 ccw(c2010,293.74) P1.13@2010,234.53 ; P1.13@1995.47,210 ccw(c1960.4,210) 1985.2,234.8 ccw(c2010,259.6) P1.13@2010,224.53
  Bottom Layer w10: v1(1310,1575) 2140,1575 2255,1690 U5.2@2355,1690 ; v1@1320.61,1564.39 cw(c1346.21,1538.79) 1346.21,1575 cw(c1346.21,1611.21) v1@1320.61,1585.61 ; U5.2@2337.66,1672.66 ccw(c2295.79,1630.79) 2295.79,1690 ccw(c2295.79,1749.21) U5.2@2337.66,1707.34 ; U5.2@2344.73,1679.73 ccw(c2319.93,1654.93) 2319.93,1690 ccw(c2319.93,1725.07) U5.2@2344.73,1700.27
17: cpu1.19 P1.15 U5.4 | length 3546.3
  Top Layer w10: cpu1.19@1059.86,1298.73 cw(c1063.54,1302.29) 1059.92,1305.91 ; cpu1.19@1059.84,1298.78 cw(c1076.86,1298.78) 1064.83,1310.81 ; v1@1304.39,1489.39 ccw(c1278.79,1463.79) 1278.79,1500 ccw(c1278.79,1536.21) v1@1304.39,1510.61 ; v1(1315,1500) 1254.01,1500 1059.92,1305.91 ; P1.15@2085.47,210 ccw(c2026.26,210) 2068.13,251.87 ccw(c2110,293.74) P1.15@2110,234.53 ; P1.15@2095.47,210 ccw(c2060.4,210) 2085.2,234.8 ccw(c2110,259.6) P1.15@2110,224.53 ; P1.15@2110,210 2055,265 2055,515 1840,730 1560,730 1059.92,1230.08 cpu1.19@1059.92,1274.17 1059.92,1305.91
  Bottom Layer w10: v1(1315,1500) 2355,1500 U5.4@2355,1490 ; v1@1325.61,1489.39 cw(c1351.21,1463.79) 1351.21,1500 cw(c1351.21,1536.21) v1@1325.61,1510.61 ; 2271.64,1500 cw(c2271.64,1406.64) U5.4@2337.66,1472.66 ; 2295.79,1500 cw(c2295.79,1430.79) U5.4@2344.73,1479.73 ; U5.4@2337.66,1507.34 cw(c2319.93,1525.07) 2319.93,1500 cw(c2319.93,1454.93) U5.4@2351.8,1486.8
20: cpu1.20
21: cpu1.21
22: cpu1.22
23: cpu1.23
24: cpu1.24
25: cpu1.25
26: cpu1.26
27: cpu1.27
30: cpu1.28
31: cpu1.29
32: cpu1.30
33: cpu1.31
34: cpu1.32
35: cpu1.33
36: cpu1.34
37: cpu1.35
40: cpu1.36
41: cpu1.37
42: cpu1.38
43: cpu1.39
44: cpu1.40
45: cpu1.41
46: cpu1.42
47: cpu1.43
50: cpu1.44
51: cpu1.45
52: cpu1.46
53: cpu1.47
54: cpu1.48
55: cpu1.49
56: cpu1.50
57: cpu1.51
60: cpu1.59 P1.11 | length 2237.4
  Top Layer w10: cpu1.59@1118.98,1750.55 1118.98,1433.98 990,1305 990,1185 1555,620 1750,620 1860,510 1860,260 P1.11@1910,210 ; P1.11@1885.47,210 ccw(c1826.26,210) 1868.13,251.87 ccw(c1910,293.74) P1.11@1910,234.53 ; P1.11@1895.47,210 ccw(c1860.4,210) 1885.2,234.8 ccw(c1910,259.6) P1.11@1910,224.53
61: cpu1.60 P1.9 | length 2323.9
  Top Layer w10: 980,1323.13 1099.29,1442.42 cpu1.60@1099.29,1750.55 ; 985,1328.13 965,1308.13 965,1170 1545,590 1660,590 v1(1815,435) ; v1@1800,435 ccw(c1763.79,435) 1789.39,460.61 ccw(c1815,486.21) v1@1815,450
  Bottom Layer w10: P1.9@1810,210 1860,260 1860,390 v1(1815,435) ; P1.9@1810,224.53 ccw(c1810,259.6) 1834.8,234.8 ccw(c1859.6,210) P1.9@1824.53,210 ; P1.9@1810,234.53 ccw(c1810,293.74) 1851.87,251.87 ccw(c1893.74,210) P1.9@1834.53,210 ; v1@1815,420 cw(c1815,383.79) 1840.61,409.39 cw(c1866.21,435) v1@1830,435
62: cpu1.61 P1.7 | length 2294.4
  Top Layer w10: cpu1.61@1079.61,1750.55 1079.61,1449.61 980,1350 978.13,1350 940,1311.87 940,1160 1545,555 1630,555 v1(1755,430) ; v1@1740,430 ccw(c1703.79,430) 1729.39,455.61 ccw(c1755,481.21) v1@1755,445
  Bottom Layer w10: P1.7@1710,210 1760,260 1760,425 v1(1755,430) ; P1.7@1710,224.53 ccw(c1710,259.6) 1734.8,234.8 ccw(c1759.6,210) P1.7@1724.53,210 ; P1.7@1710,234.53 ccw(c1710,293.74) 1751.87,251.87 ccw(c1793.74,210) P1.7@1734.53,210 ; v1@1744.39,419.39 cw(c1706.72,381.72) 1760,381.72 ; v1@1751.46,426.46 cw(c1730.86,405.86) 1760,405.86 cw(c1779.14,405.86) v1@1765.61,419.39
63: cpu1.2 P1.5 | length 2393.9
  Top Layer w10: cpu1.2@930,1640.32 765.32,1640.32 680,1555 680,910 1175,415 1175,225 1287.5,112.5 1547.5,112.5 1610,175 ; P1.5@1601.63,186.94 cw(c1597.29,175) 1610,175 ; P1.5@1610,210 1610,175 ; P1.5@1618.37,186.94 ccw(c1622.71,175) 1610,175
64: cpu1.3 P1.3 | length 2243.2
  Top Layer w10: cpu1.3@930,1620.63 785.63,1620.63 720,1555 720,970 1220,470 1220,275 1350,145 1445,145 P1.3@1510,210 ; P1.3@1485.47,210 cw(c1426.26,210) 1468.13,168.13 cw(c1510,126.26) P1.3@1510,185.47 ; P1.3@1495.47,210 cw(c1460.4,210) 1485.2,185.2 cw(c1510,160.4) P1.3@1510,195.47
65: cpu1.4 P1.1 | length 1900
  Top Layer w10: cpu1.4@930,1600.95 805.95,1600.95 745,1540 745,1040 1260,525 1260,315 1365,210 ; P1.1@1389.39,196.71 ccw(c1365,180.99) 1365,210 ; P1.1@1389.39,223.29 cw(c1365,239.01) 1365,210 ; P1.1@1410,210 1365,210
66: cpu1.5 P3.1 U5.6 | length 2390.4
  Top Layer w10: v1@796,1492 ccw(c782.5,1510) 805,1510 ; v1(805,1480) 805,1510 ; v1@814,1492 cw(c827.5,1510) 805,1510 ; cpu1.5@930,1581.26 826.26,1581.26 805,1560 805,1510
  Bottom Layer w10: v1@805,1465 cw(c805,1428.79) 830.61,1454.39 cw(c856.21,1480) v1@820,1480 ; v1(805,1480) 890,1395 1805,1395 1890,1310 P3.1@1965,1310 2125,1310 2145,1290 U5.6@2355,1290 U5.6@2360,1290 ; P3.1@1947.66,1292.66 ccw(c1905.79,1250.79) 1905.79,1310 ccw(c1905.79,1369.21) P3.1@1947.66,1327.34 ; P3.1@1954.73,1299.73 ccw(c1929.93,1274.93) 1929.93,1310 ccw(c1929.93,1345.07) P3.1@1954.73,1320.27 ; P3.1@1975.27,1299.73 cw(c2000.07,1274.93) 2000.07,1310 cw(c2000.07,1345.07) P3.1@1975.27,1320.27 ; P3.1@1982.34,1292.66 cw(c2024.21,1250.79) 2024.21,1310 cw(c2024.21,1369.21) P3.1@1982.34,1327.34 ; U5.6@2337.66,1272.66 ccw(c2295.79,1230.79) 2295.79,1290 ccw(c2295.79,1349.21) U5.6@2337.66,1307.34 ; U5.6@2344.73,1279.73 ccw(c2319.93,1254.93) 2319.93,1290 ccw(c2319.93,1325.07) U5.6@2344.73,1300.27
67: cpu1.6 P3.2 U5.8 | length 2309
  Top Layer w10: v1(850,1525) 850,1540 871.57,1561.57 cpu1.6@930,1561.57 ; v1@854.73,1526.61 cw(c876.43,1534.01) 860.22,1550.22 ; v1@864.2,1529.84 cw(c893.36,1539.79) 871.57,1561.57 ; P3.2@1965,1410 2015,1410 ; P3.2@1976.49,1401.11 cw(c1994.61,1387.08) 1994.61,1410 cw(c1994.61,1432.92) P3.2@1976.49,1418.89 ; P3.2@1984.4,1394.99 cw(c2015,1371.31) 2015,1410 ; P3.2@1984.4,1425.01 ccw(c2015,1448.69) 2015,1410 ; U5.8@2337.66,1072.66 ccw(c2295.79,1030.79) 2295.79,1090 ccw(c2295.79,1149.21) U5.8@2337.66,1107.34 ; U5.8@2344.73,1079.73 ccw(c2319.93,1054.93) 2319.93,1090 ccw(c2319.93,1125.07) U5.8@2344.73,1100.27 ; U5.8@2360,1090 U5.8@2355,1090 2140,1090 2065,1165 2065,1360 2015,1410
  Bottom Layer w10: v1@839.39,1514.39 cw(c813.79,1488.79) 850,1488.79 cw(c886.21,1488.79) v1@860.61,1514.39 ; v1(850,1525) 850,1485 900,1435 1940,1435 P3.2@1965,1410